# Altium PCB PCB_mcu_2024-04-26.pcbdoc
Units mil, origin at the board's own origin, x right, y up, seen from the top; angles counter-clockwise.
Board outline 3187.82 x 2010 mil, 2 copper layers (Top Layer, Bottom Layer); 16 components, 33 nets, 104 pads, 12 vias.
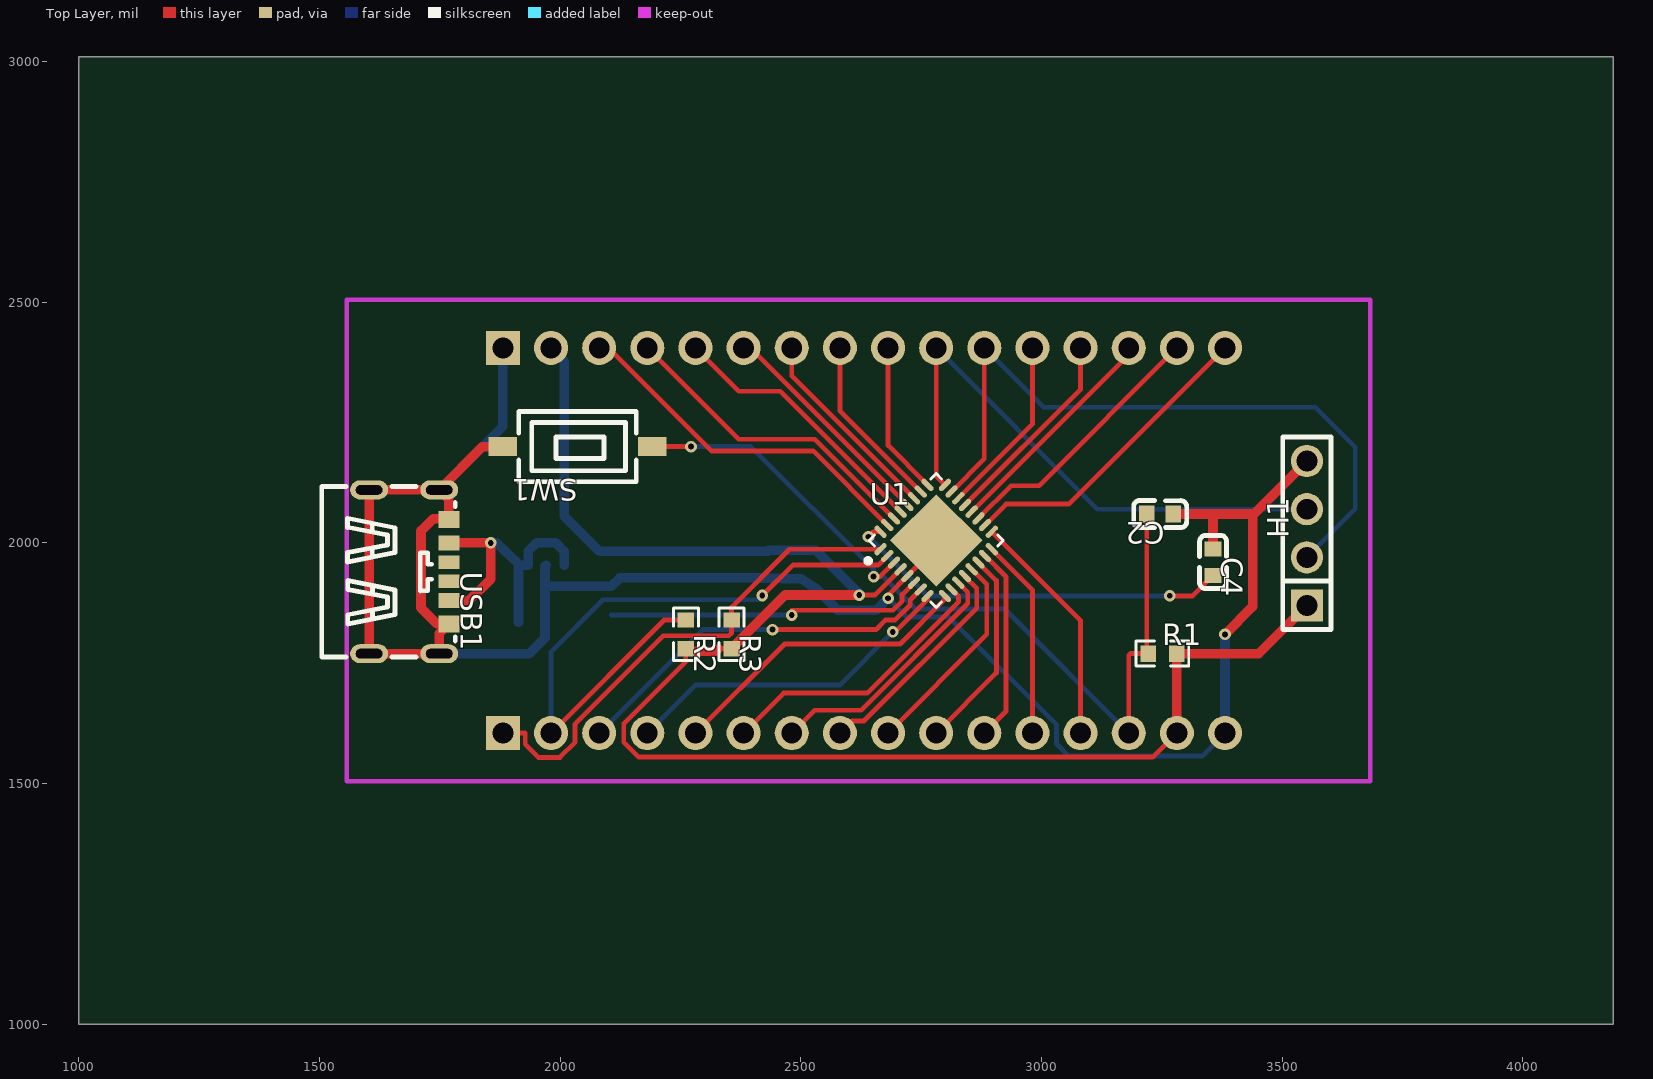
[diagram p0: Top Layer view]
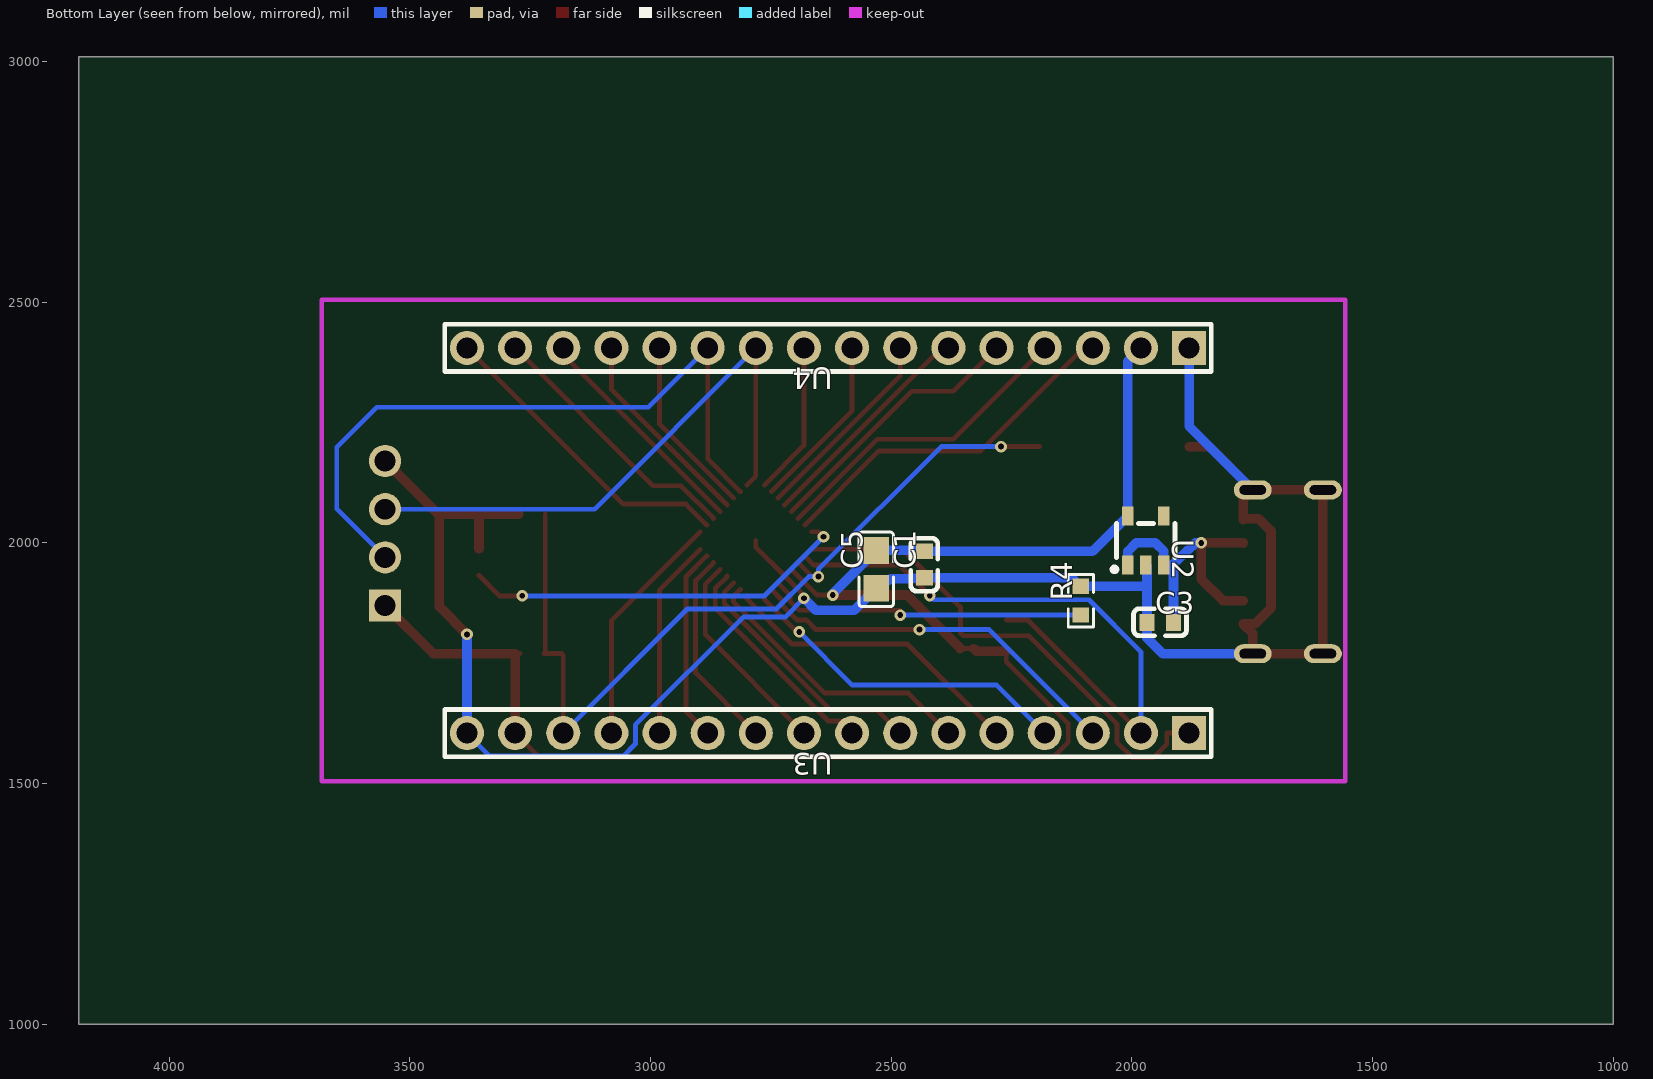
[diagram p1: Bottom Layer view, seen from below]

## Layer stack, top to bottom
Top Layer: signal copper (thickness not stored)
Dielectric: dielectric 12.6, FR-4, Dk 4.8
Bottom Layer: signal copper (thickness not stored)

## Board outline
4187.82,1000 1000,1000 1000,3010 4187.82,3010

## Components (designator, comment, footprint, x,y, rotation, side; value= is the part's Value field where it differs from the comment)
C1 "100nF" C0603#1 2431.22,1955 r270 bottom
C2 "100nF" C0603#2 3246.22,2060 r180 top
C3 "100nF" C0603#1 1941.22,1835 r0 bottom
C4 "470nF" C0603#2 3356.22,1960 r270 top
C5 "10uF" C0805 2531.22,1945 r270 bottom
H1 "PZ254V-11-04P_C2691448" HDR-TH_4P-P2.54-V-M 3551.22,2020 r90 top
R1 "47kΩ" R0603#1 3251.22,1770 r0 top
R2 "10kΩ" R0603#1 2261.22,1810 r270 top
R3 "10kΩ" R0603#1 2356.22,1810 r270 top
R4 "100kΩ" R0603#2 2106.22,1880 r270 bottom
SW1 "TS-1092S-B3D2-G" SW-SMD_L6.1-W3.6-LS7.9 2036.22,2200 r180 top
U1 "MSPM0L1306SRHBR" VQFN-32_L5.0-W5.0-P0.50-TL-EP3.5 2781.22,2005 r45 top
U2 "ME6211C15M5G" SOT-23-5_L3.0-W1.7-P0.95-LS2.8-BR 1971.22,2005 r90 bottom
U3 "ZX-PZ2.54-1-16PZZ" HDR-TH_16P-P2.54-V-M-2 2631.22,1605 r180 bottom
U4 "ZX-PZ2.54-1-16PZZ" HDR-TH_16P-P2.54-V-M-2 2631.22,2405 r180 bottom
USB1 "TYPE-C-31-M-16" TYPE-C-SMD_TYPE-C-31-M-16 1686.22,1940 r270 top

## Footprints (in the part's own frame and the unit in brackets; to place one, negate y for a bottom-side part, rotate by r counter-clockwise, add the part's x,y. Pads: shape width x height; smd on the part's side, far side on the other; paste and mask are expansions set on the pad)
C0603#1 [mm]
  rect 0.8x0.9 smd paste+0 mask+0.051: 1(0.7,0) 2(-0.7,0)
  silkscreen extent -1.39,-0.72 1.41,0.71
C0603#2 [mm]
  rect 0.8x0.9 smd paste+0 mask+0.051: 1(-0.7,0) 2(0.7,0)
  silkscreen extent -1.41,-0.71 1.39,0.72
C0805 [mm]
  rect 1.41x1.35 smd paste-100 mask+0.051: 1(1,0) 2(-1,0)
  silkscreen extent -1.96,-0.9 1.96,0.9
HDR-TH_4P-P2.54-V-M [mm]
  rect 1.7x1.7 hole 1.1 paste+0 mask+0.051: 1(-3.81,0)
  round 1.7 hole 1.1 paste+0 mask+0.051: 2(-1.27,0) 3(1.27,0) 4(3.81,0)
  silkscreen extent -5.08,-1.27 5.08,1.27
HDR-TH_16P-P2.54-V-M-2 [mm]
  rect 1.8x1.8 hole 1.1 paste+0 mask+0.051: 1(19.05,0)
  round 1.8 hole 1.1 paste+0 mask+0.051: 2(16.51,0) 3(13.97,0) 4(11.43,0) 5(8.89,0) 6(6.35,0) 7(3.81,0) 8(1.27,0) 9(-1.27,0) 10(-3.81,0) 11(-6.35,0) 12(-8.89,0) 13(-11.43,0) 14(-13.97,0) 15(-16.51,0) 16(-19.05,0)
  silkscreen extent -20.22,-1.25 20.22,1.25
R0603#1 [mil]
  rect 31.75x34.02 smd paste-3937.01 mask+2: 1(-29.66,0) 2(29.65,0)
  silkscreen extent -55,-26 55,26
R0603#2 [mil]
  rect 31.75x34.02 smd paste-3937.01 mask+2: 1(29.65,0) 2(-29.65,0)
  silkscreen extent -55,-26 55,26
SOT-23-5_L3.0-W1.7-P0.95-LS2.8-BR [mm]
  rect 1x0.6 smd paste+0 mask+0.051: 1(-1.3,0.95) 2(-1.3,0) 3(-1.3,-0.95) 4(1.3,-0.95) 5(1.3,0.95)
  silkscreen extent -1.65,-1.55 0.9,1.78
SW-SMD_L6.1-W3.6-LS7.9 [mm]
  rect 1.5x1 smd paste+0 mask+0.051: 1(-3.95,0) 2(3.95,0)
  silkscreen extent -3.1,-1.85 3.1,1.85
TYPE-C-SMD_TYPE-C-31-M-16 [mm]
  oval 1x2 hole 0.5 slot 1.4 at 90 deg paste+0 mask+0.051: 1(-4.32,1.595) 2(4.32,1.595) 3(-4.32,-2.105) 4(4.32,-2.105)
  rect 0.7x1.1 smd paste-100 mask+0.051: A5(-0.5,2.105) B5(0.5,2.105)
  rect 0.8x1.1 smd paste-100 mask+0.051: A9(1.52,2.105) B9(-1.52,2.105)
  rect 0.9x1.1 smd paste-100 mask+0.051: A12(2.75,2.105) B12(-2.75,2.105)
  silkscreen extent -4.5,-4.61 4.5,2.43
VQFN-32_L5.0-W5.0-P0.50-TL-EP3.5 [mm]
  oval 0.8x0.28 smd paste-100 mask+0.05: 1(-2.4,1.75) 2(-2.4,1.25) 3(-2.4,0.75) 4(-2.4,0.25) 5(-2.4,-0.25) 6(-2.4,-0.75) 7(-2.4,-1.25) 8(-2.4,-1.75) 17(2.4,-1.75) 18(2.4,-1.25) 19(2.4,-0.75) 20(2.4,-0.25) 21(2.4,0.25) 22(2.4,0.75) 23(2.4,1.25) 24(2.4,1.75)
  oval 0.28x0.8 smd paste-100 mask+0.05: 9(-1.75,-2.4) 10(-1.25,-2.4) 11(-0.75,-2.4) 12(-0.25,-2.4) 13(0.25,-2.4) 14(0.75,-2.4) 15(1.25,-2.4) 16(1.75,-2.4) 25(1.75,2.4) 26(1.25,2.4) 27(0.75,2.4) 28(0.25,2.4) 29(-0.25,2.4) 30(-0.75,2.4) 31(-1.25,2.4) 32(-1.75,2.4)
  rect 3.45x3.45 smd paste-100 mask+0.05: 33(0,0)
  silkscreen extent -3.43,-2.5 2.5,2.5

## Via types
v1: diameter 24.02, hole 12.01, Top Layer to Bottom Layer, tented both sides, 11 vias
v2: diameter 24.41, hole 12.2, Top Layer to Bottom Layer, tented both sides, 1 vias

## Nets (pads, with @x,y where several pads share a name; then routed paths per layer and width w, separated by ;. In a path a pad name is that pad's centre, name@x,y a point inside that pad or via, vN(x,y) a via of type N, cw(c..) or ccw(c..) an arc to the next point about the centre after c; other vN are vias at no path point)
+5V: C3.2 U2.1 U2.3 USB1.A9 USB1.B9 | length 644.7
  Top Layer w20: USB1.A9 1811.02,1880.2 1856.22,1925 v1(1856.22,2000) USB1.B9
  Bottom Layer w10: U2.3 U2.3@1933.82,1969.15
  Bottom Layer w20: v1(1856.22,2000) 1867.95,2000 1916.31,1953.81 U2.3 1933.82,1982.6 1951.22,2000 1991.22,2000 2008.62,1982.6 U2.1 ; C3.2 1913.66,1953.81
GND: C1.1 C2.1 C3.1 C4.1 C5.1 H1.4 R4.2 SW1.2 U1.5 U1.33 U2.2 U3.16 U4.1 USB1.1 USB1.2 USB1.3 USB1.4 USB1.A12 USB1.B12 | length 4817.2
  Top Layer w10: v1(2681.22,1885) 2681.22,1891.07 U1.5 2781.21,1991.06 U1.33
  Top Layer w20: SW1.2 1840.19,2200 1838.94,2200 USB1.1 ; C2.1 3353.82,2060 3356.22,2060 ; C4.1 3356.22,2060 ; v2(3381.22,1810) 3438.62,1867.4 3438.62,2060 3356.22,2060 ; H1.4 3441.22,2060 3356.22,2060 ; USB1.1 1769.09,2090.01 USB1.B12 1767.36,2050 1736.22,2050 1711.22,2025 1711.22,1865 1744.49,1831.74 USB1.A12 1749.02,1811.67 USB1.2 1603.35,1769.93 1603.35,2110.08 USB1.1
  Bottom Layer w10: 1881.22,2358.58 U4.1 ; R4.2@2092.22,1909.66 R4.2 ; C1.1@2416.87,1927.44 C1.1 ; v1(2681.22,1885) 2720.41,1845.81 2807.37,1845.81 3031.22,1621.96 3031.22,1582.3 3056.3,1557.22 3333.44,1557.22 U3.16
  Bottom Layer w20: USB1.2 1936.22,1769.93 1968.78,1802.49 C3.1 1968.78,1951.37 U2.2 ; USB1.1 1881.22,2242.28 U4.1 ; 1968.78,1909.66 R4.2 2124,1927.44 C1.1 ; C1.1@2416.87,1927 2501.22,1925 C5.1 2576.85,1860 2656.22,1860 v1(2681.22,1885) ; U3.16 v2(3381.22,1810)
NRST: C2.2 R1.1 SW1.1 U1.3 U3.14 | length 1817.1
  Top Layer w10: SW1.1 v1(2271.96,2200) ; v1(2651.22,1930) 2664.47,1930 U1.3 ; U3.14 3181.22,1766.52 3184.7,1770 R1.1 ; 3198.13,1770 R1.1 ; C2.2 3218.66,1772.9 R1.1
  Bottom Layer w10: v1@2271.92,2200 2396.22,2200 2651.22,1945 v1(2651.22,1930) 2671.15,1930 2738.46,1862.69 2923.53,1862.69 U3.14
PA0: R3.1 U1.1 U3.1 | length 1052.1
  Top Layer w10: U3.1 1927.64,1605 1927.64,1581.79 1954.89,1554.54 1999.73,1554.54 2031.22,1586.03 2031.22,1624.48 2214.02,1807.28 2350.71,1807.28 2356.22,1812.79 R3.1 2356.22,1866.52 2476.6,1986.9 U1.1
PA1: R2.1 U1.2 U3.2 | length 1327
  Top Layer w10: U3.2 2215.88,1839.66 R2.1 ; v1(2420.08,1890.77) 2483.2,1953.89 2660.52,1953.89 U1.2
  Bottom Layer w10: U3.2 1981.22,1774.05 2089.11,1881.94 2411.25,1881.94 v1(2420.08,1890.77)
PA3: U1.7 U3.3 | length 797.7
  Top Layer w10: v1(2441.22,1820) 2656.22,1820 2676.22,1840 2696.22,1840 2727.22,1871 2727.22,1881.4 U1.7
  Bottom Layer w10: U3.3 2296.22,1820 v1(2441.22,1820)
PA4: U1.8 U3.4 | length 704.2
  Top Layer w10: v1(2691.22,1815) 2696.22,1815 2763.12,1881.9 U1.8
  Bottom Layer w10: U3.4 2280.75,1704.53 2580.75,1704.53 v1(2691.22,1815)
PA5: U1.9 U3.5 | length 639.7
  Top Layer w10: U3.5 2466.22,1790 2706.22,1790 2799.32,1883.1 U1.9
PA6: U1.10 U3.6 | length 591
  Top Layer w10: U3.6 2464.26,1688.04 2637.87,1688.04 2827.66,1877.83 2827.66,1888.95 U1.10
PA7: U1.11 U3.7 | length 528.5
  Top Layer w10: U3.7 2528.62,1652.4 2625.21,1652.4 2846.92,1874.11 2846.92,1897.53 U1.11
PA8: U1.12 U3.8 | length 468.6
  Top Layer w10: U3.8 2606.22,1630 2631.22,1630 2865.32,1864.1 2865.32,1905.9 2841.02,1930.1 U1.12@2841.02,1931.2
PA9: U1.13 U3.9 | length 437.9
  Top Layer w10: U3.9 2886.22,1810 2886.22,1913.9 U1.13@2855.02,1945.1
PA10: U1.14 U3.10 | length 421.3
  Top Layer w10: U3.10 2906.22,1730 2906.22,1921.8 U1.14
PA11: U1.15 U3.11 | length 404.6
  Top Layer w10: U3.11 2926.22,1650 2926.22,1929.6 U1.15
PA12: U1.16 U3.12 | length 416.9
  Top Layer w10: U1.16 2981.22,1902.43 U3.12
PA13: U1.17 U3.13 | length 494.5
  Top Layer w10: U1.17 3081.22,1838.62 U3.13
PA14: U1.18 U4.16 | length 650.8
  Top Layer w10: U1.18 2926.33,2080.5 3056.72,2080.5 U4.16
PA15: U1.19 U4.15 | length 559
  Top Layer w10: U1.19 2936.81,2118.82 2995.04,2118.82 U4.15
PA16: U1.20 U4.14 | length 475.3
  Top Layer w10: U1.20@2855,2064.85 3181.22,2391.07 U4.14
PA17: U1.21 U4.13 | length 425.7
  Top Layer w10: U1.21 3081.22,2318.91 U4.13
PA18: U1.22 U4.12 | length 376.1
  Top Layer w10: U1.22 2981.22,2246.75 U4.12
PA21: U1.25 U4.9 | length 318.4
  Top Layer w10: U4.9 2681.22,2202.43 U1.25
PA22: U1.26 U4.8 | length 368
  Top Layer w10: U4.8 2581.22,2274.59 U1.26
PA23: U1.27 U4.7 | length 417.5
  Top Layer w10: U4.7 2481.22,2346.75 U1.27
PA24: U1.28 U4.6 | length 475.3
  Top Layer w10: U4.6 2395.13,2405 U1.28
PA25: U1.29 U4.5 | length 567.1
  Top Layer w10: U4.5 2371.22,2315 2457.29,2315 U1.29
PA26: U1.30 U4.4 | length 659
  Top Layer w10: U4.4 2370.88,2215.34 2529.11,2215.34 U1.30
PA27: U1.31 U4.3 | length 750.8
  Top Layer w10: U4.3 2100.1,2405 2314.16,2190.94 2525.67,2190.94 U1.31
SWCLK: H1.3 U1.24 U4.10 | length 1200.7
  Top Layer w10: U4.10 2781.22,2138.63 U1.24
  Bottom Layer w10: U4.10 3116.22,2070 H1.3
SWDIO: H1.2 U1.23 U4.11 | length 1452.7
  Top Layer w10: U1.23 2881.22,2174.59 U4.11
  Bottom Layer w10: U4.11 3004.32,2281.9 3568.24,2281.9 3651.73,2198.41 3651.73,2070.51 H1.2
U1_6: R4.1 U1.6 | length 670.7
  Top Layer w10: v1(2481.22,1850) 2481.22,1860 2691.22,1860 2710.42,1879.2 2710.42,1892.5 U1.6
  Bottom Layer w10: R4.1 2134.22,1850.34 2480.88,1850.34 v1(2481.22,1850)
U1_32: C4.2 U1.32 | length 813.4
  Top Layer w10: v1(2640.6,2012.61) 2651.08,2023.09 U1.32 ; v1(3266.22,1890) 3313.78,1890 C4.2
  Bottom Layer w10: v1(2640.6,2012.61) 2763.21,1890 v1(3266.22,1890)
VCC: C1.2 C5.2 H1.1 R1.2 R2.2 R3.2 U1.4 U2.5 U3.15 U4.2 | length 3484.6
  Top Layer w10: R2.2 2261.22,1775.17 2261.22,1753.48 2132.37,1624.63 2132.37,1585.98 2163.41,1554.94 3231.16,1554.94 U3.15 ; 2328.22,1780.34 R3.2 ; v1(2621.51,1891.68) 2654.02,1891.7 U1.4 ; R1.2@3270.88,1769.88 3271,1770 R1.2
  Top Layer w20: R2.2@2261.22,1775.17 2323.05,1775.17 2328.22,1780.34 ; R3.2 2467.56,1891.68 v1(2621.51,1891.68) ; U3.15 R1.2 3451.22,1770 H1.1
  Bottom Layer w10: C5.2@2526.41,1979.37 2526.41,1979.56 C5.2
  Bottom Layer w20: U4.2 2008.62,2377.6 U2.5 2082.24,1982.56 C1.2 2433.03,1984.37 C5.2 2621.51,1894.08 v1(2621.51,1891.68)
pads on no net: U2.4 USB1.A5 USB1.B5